# Altium PCB PCB1.PcbDoc
Units mm, origin at the board's own origin, x right, y up, seen from the top; angles counter-clockwise.
Board outline 152.4 x 101.6 mm, 2 copper layers (Top Layer, Bottom Layer); 44 components, 31 nets, 176 pads, 0 vias.
Unrouted connection lines stored in the file: 12.
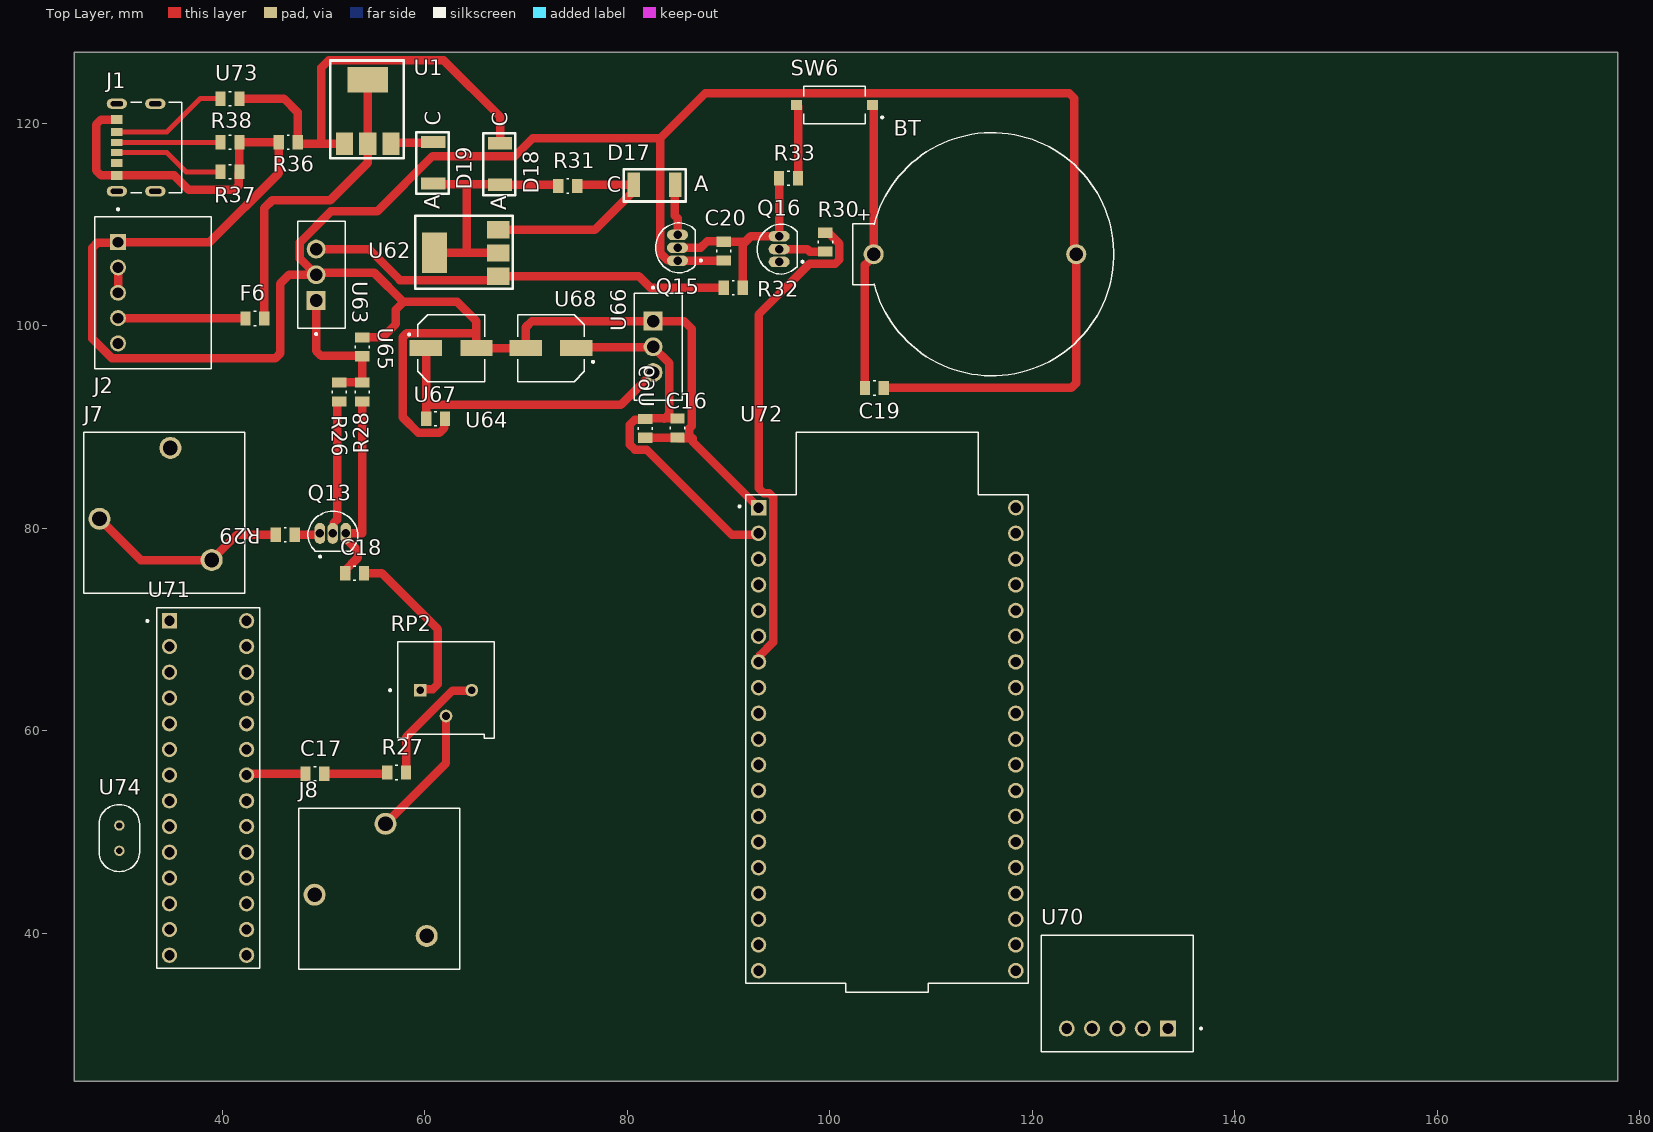
[diagram p0: Top Layer view]
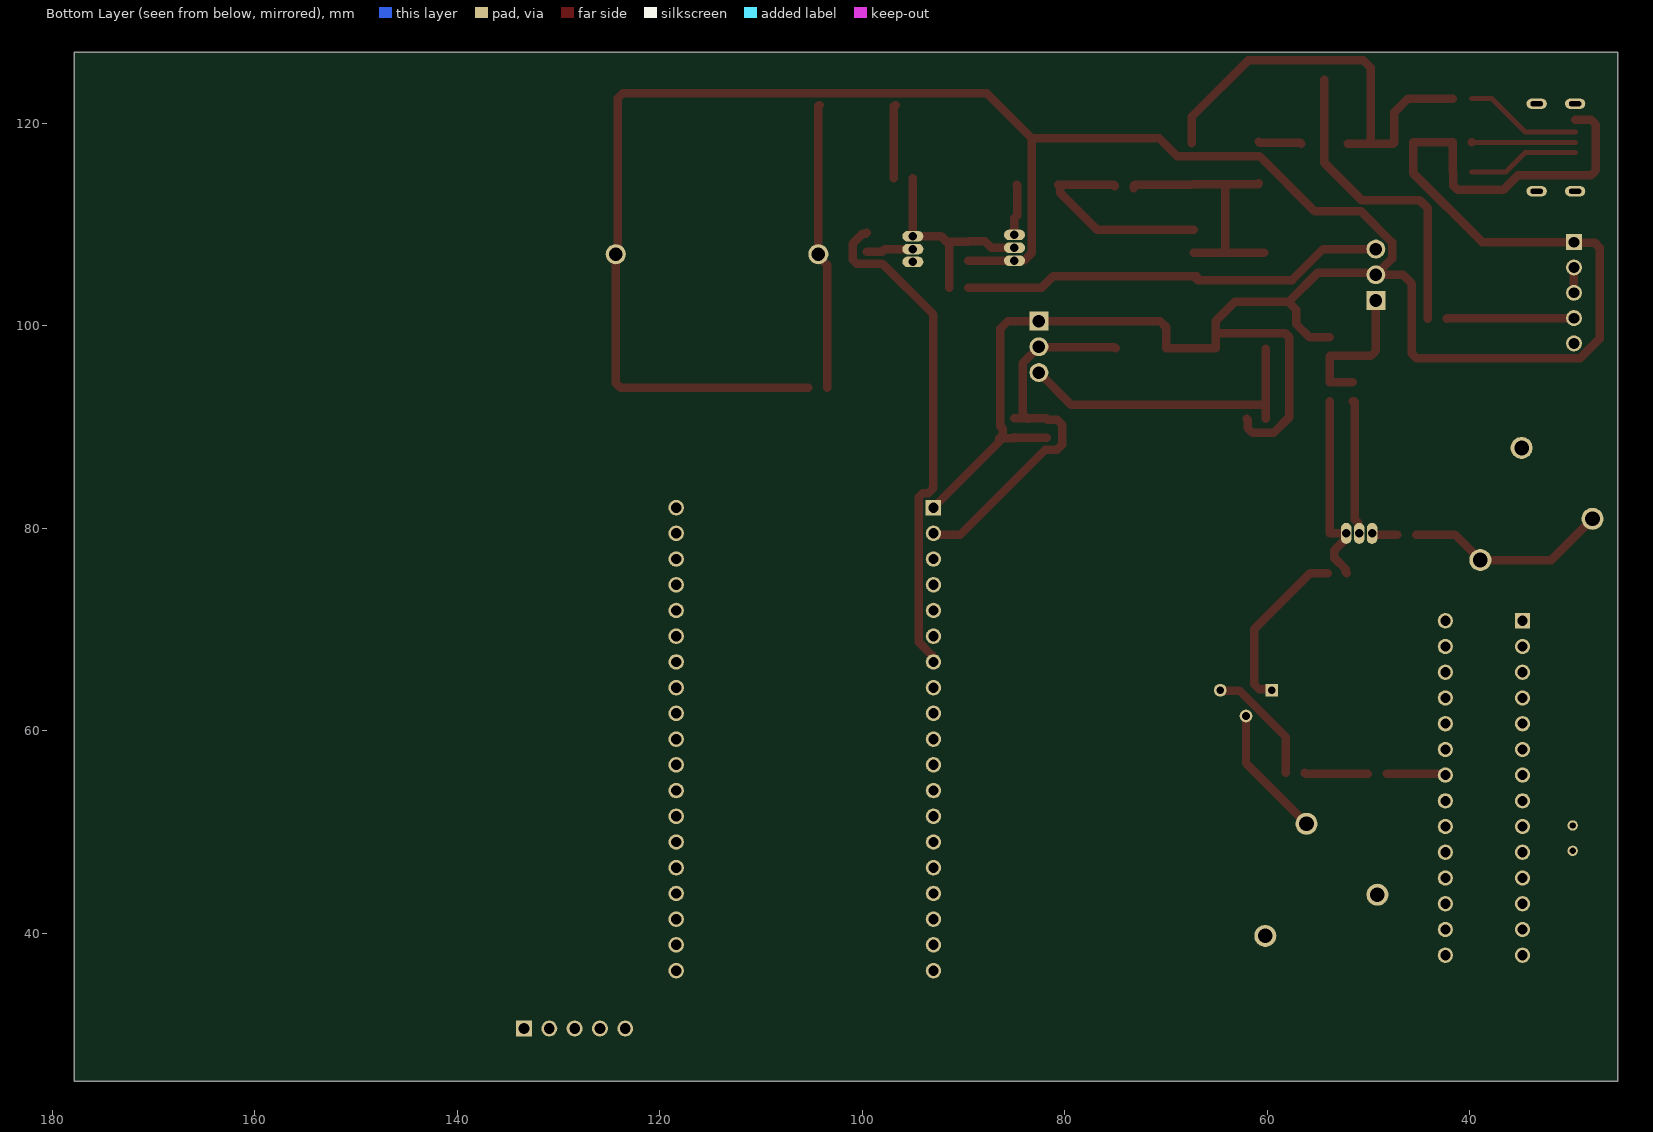
[diagram p1: Bottom Layer view, seen from below]
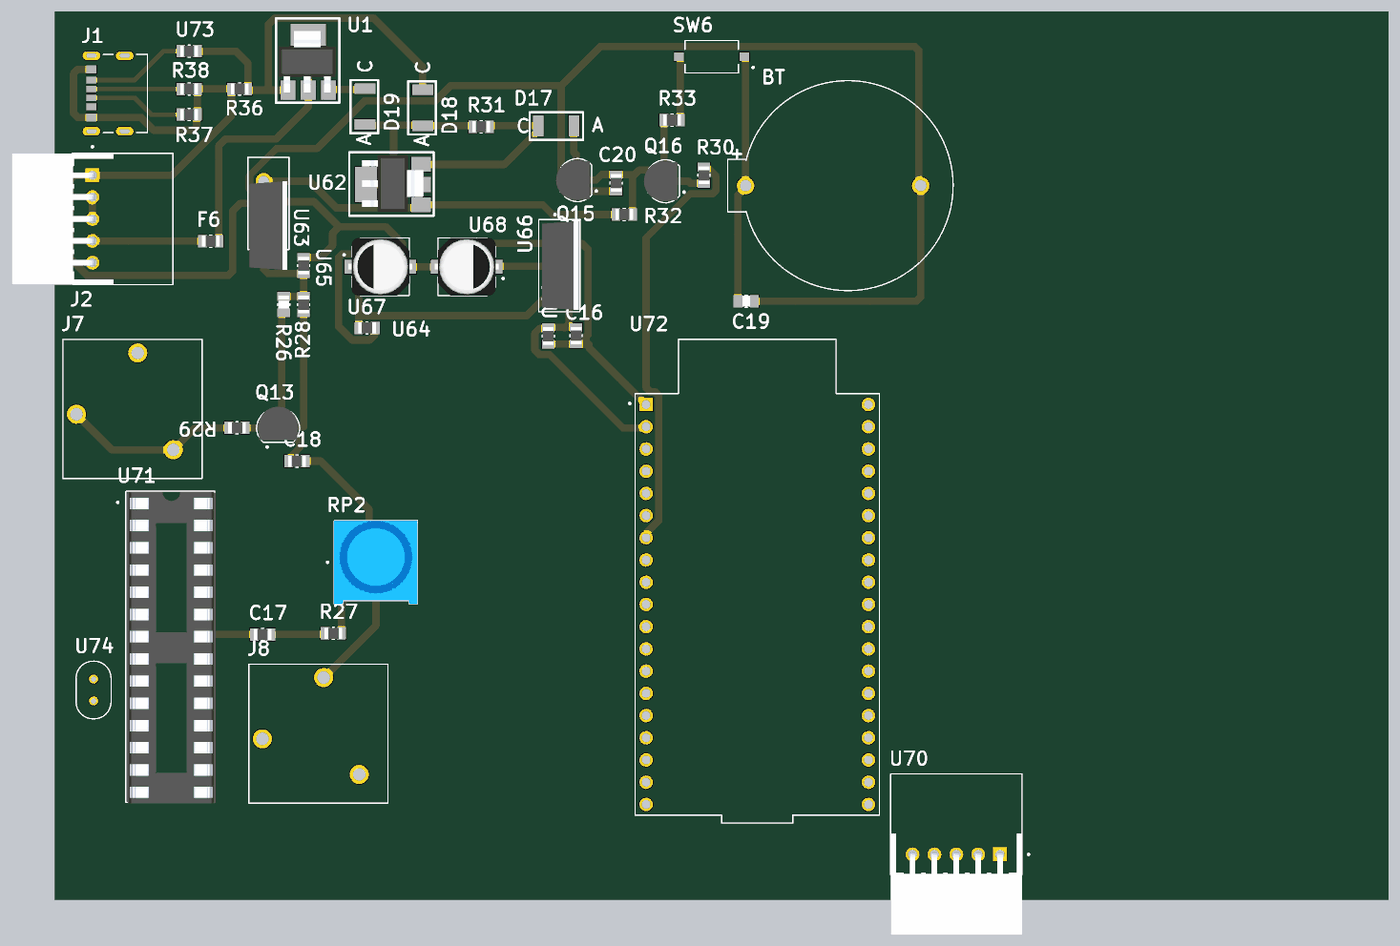
[diagram p2: 3D render of the assembled board from above, using the file's embedded part models]

## Layer stack, top to bottom
Top Solder: solder mask 0.0102, Solder Resist, Dk 3.5
Top Layer: signal copper 0.0356
Dielectric 1: dielectric 0.32, FR-4, Dk 4.8
Bottom Layer: signal copper 0.0356
Bottom Solder: solder mask 0.0102, Solder Resist, Dk 3.5

## Board outline
25.4,25.4 177.8,25.4 177.8,127 25.4,127

## Design rules (kind name [scope] priority, off if disabled: settings)
Clearance [All] p1: gap=0.254 ignorepadtopadclearanceinfootprint=FALSE
PolygonConnect [All] p1: connectstyle=Relief reliefconductorwidth=0.254 reliefentries=4 polygonreliefangle="90 Angle" airgapwidth=0.254
RoutingVias [All] p1: holewidth=0.711 width=1.27 viastyle="Through Hole" minholewidth=0.711 minwidth=1.27 maxholewidth=0.711 maxwidth=1.27
SolderMaskExpansion [All] p1: expansion=0.102 istentingtop=FALSE
Width [All] p1: maxlimit=0.838 minlimit=0.254 preferedwidth=0.838 bottomlayer_maxwidth=0.254 bottomlayer_prefwidth=0.254 minimp=50.000000 maximp=50.000000 favimp=50.000000
30 further rules are at their usual default settings.

## Components (designator, comment, footprint, x,y, rotation, side; value= is the part's Value field where it differs from the comment)
BT "BH32T-C-G" BAT_BH32T-C-G 116.033,107.061 r270 top
C16 "0.1UF" RESC2012X60N 84.963,89.916 r90 top
C17 "100nF" RESC2012X60N 49.149,55.753 r0 top
C18 "100nF" RESC2012X60N 53.086,75.565 r0 top
C19 "0.1UF" RESC2012X60N 104.394,93.853 r180 top
C20 "4.7UF" RESC2012X60N 89.535,107.361 r90 top
D17 "DSCHOTTKY" SS34BF 84.745,113.919 r180 top
D18 "DSCHOTTKY" SS34BF 67.437,113.919 r90 top
D19 "DSCHOTTKY" SS34BF 60.833,114.046 r90 top
F6 "MFU0603FF04000P500" RESC2012X60N 43.226,100.711 r0 top
J1 "UJC-HP-3-SMT-TR" CUI_UJC-HP-3-SMT-TR 29.601,117.6 r90 top
J2 "XH250-05R-010" VALCON_XH250-05R-010 29.718,103.251 r270 top
J7 "320B/PJ-001 3.5Jacks" REAN_RJ3VM 34.29,81.534 r0 top
J8 "320B/PJ-001 3.5Jacks" REAN_RJ3VM 55.528,44.421 r0 top
Q13 "2N3904_C2874602" TO92127P495H495-3 50.927,79.502 r0 top
Q15 "2N3904(SOT-23)" TO92127P495H495-3 84.963,107.696 r90 top
Q16 "2N3904(SOT-23)" TO92127P495H495-3 94.996,107.569 r90 top
R26 "430k" RESC2012X60N 51.562,93.472 r90 top
R27 "43k" RESC2012X60N 57.231,55.88 r180 top
R28 "10k" RESC2012X60N 53.848,93.472 r90 top
R29 "390" RESC2012X60N 46.228,79.375 r0 top
R30 "100k" RESC2012X60N 99.568,108.25 r90 top
R31 "100k" RESC2012X60N 74.122,113.792 r180 top
R32 "100k" RESC2012X60N 90.47,103.759 r0 top
R33 "100k" RESC2012X60N 95.931,114.554 r0 top
R36 "1k" RESC2012X60N 46.528,118.11 r180 top
R37 "5.1k" RESC2012X60N 40.767,115.189 r0 top
R38 "5.1k" RESC2012X60N 40.767,118.11 r0 top
RP2 "R_3386P_EU" TRIM_3386P-1-101TLF 62.103,64.023 r0 top
SW6 "CHS-01TB" SW_TS09-63-25-R-260-SMT-TR 100.457,121.793 r180 top
U1 "IRFL9014" IRFL9014#1 54.37,124.283 r0 top
U62 "IRFL9014" IRFL9014#2 60.96,107.188 r270 top
U63 "7805(SOT-89)" TO254P1054X470X2600-3 49.276,102.489 r90 top
U64 "330nF" RESC2012X60N 61.087,90.805 r180 top
U65 "100nF" RESC2012X60N 53.848,97.917 r270 top
U66 "LM1117T-3.3" TO254P1054X470X1955-3 82.55,97.917 r270 top
U67 "10uF" CAP_EEEHB1H100P 62.611,97.79 r0 top
U68 "10uF" CAP_EEEHB1H100P 72.477,97.79 r180 top
U69 "720-LCGH9RNMXNX1" RESC2012X60N 81.788,89.87 r90 top
U70 "ZJY096S0700BG01蓝色" VALCON_XH250-05R-010 128.397,30.607 r180 top
U71 "DSPIC33FJ128MC802T-I/SO" OST_ED281DT 38.608,54.356 r0 top
U72 "ESP32-S3-WROOM-1U" MODULE_ESP32-DEVKITC 105.664,59.192 r0 top
U73 "2A/100V" RESC2012X60N 40.767,122.428 r0 top
U74 "Crystal Oscillator 10.8x4.5mm" XTAL_ECS-400-20-46X 29.845,49.403 r270 top

## Footprints (in the part's own frame and the unit in brackets; to place one, negate y for a bottom-side part, rotate by r counter-clockwise, add the part's x,y. Pads: shape width x height; smd on the part's side, far side on the other; paste and mask are expansions set on the pad)
BAT_BH32T-C-G [mil]
  round 78 hole 52: NEG(0,326.77) POS(0,-460.63)
  silkscreen extent -473,-541 473,472
CAP_EEEHB1H100P [mm]
  rect 3.2x1.6 smd: 1(-2.5,0) 2(2.5,0)
  silkscreen extent -4.25,-3.3 3.3,3.3, body extent -3.65,-3.3 3.65,3.3, height 5.8
CUI_UJC-HP-3-SMT-TR [mm]
  rect 0.7x1.15 smd: A5(-0.5,0.005) B5(0.5,0.005)
  rect 0.8x1.15 smd: A9(1.52,0.005) B9(-1.52,0.005)
  rect 0.9x1.15 smd: A12(2.75,0.005) B12(-2.75,0.005)
  oval 1x2 hole 0.5 slot 1.2 at 90 deg: S1(-4.32,0) S2(4.32,0) S3(-4.32,-3.8) S4(4.32,-3.8)
  silkscreen extent -4.47,-6.4 4.47,-1.35
IRFL9014#1 [mm]
  rect 1.7x2.2 smd mask+0.102: 1(-2.3,-6.3) 2(0,-6.3) 3(2.3,-6.3)
  rect 4x2.5 smd: 4(0,0)
  silkscreen extent -3.68,-7.75 3.56,1.91, body extent -3.38,-6.55 3.12,0.45, height 1.8
IRFL9014#2 [mm]
  rect 1.7x2.2 smd mask+0.102: 1(-2.3,6.3) 2(0,6.3) 3(2.3,6.3)
  rect 4x2.5 smd: 4(0,0)
  silkscreen extent -3.68,-1.91 3.56,7.75, body extent -3.38,-0.45 3.12,6.55, height 1.8
MODULE_ESP32-DEVKITC [mm]
  rect 1.53x1.53 hole 1.02: 1(-12.7,22.85)
  round 1.53 hole 1.02: 2(-12.7,20.31) 3(-12.7,17.77) 4(-12.7,15.23) 5(-12.7,12.69) 6(-12.7,10.15) 7(-12.7,7.61) 8(-12.7,5.07) 9(-12.7,2.53) 10(-12.7,-0.01) 11(-12.7,-2.55) 12(-12.7,-5.09) 13(-12.7,-7.63) 14(-12.7,-10.17) 15(-12.7,-12.71) 16(-12.7,-15.25) 17(-12.7,-17.79) 18(-12.7,-20.33) 19(-12.7,-22.87) 20(12.7,-22.87) 21(12.7,-20.33) 22(12.7,-17.79) 23(12.7,-15.25) 24(12.7,-12.71) 25(12.7,-10.17) 26(12.7,-7.63) 27(12.7,-5.09) 28(12.7,-2.55) 29(12.7,-0.01) 30(12.7,2.53) 31(12.7,5.07) 32(12.7,7.61) 33(12.7,10.15) 34(12.7,12.69) 35(12.7,15.23) 36(12.7,17.77) 37(12.7,20.31) 38(12.7,22.85)
  silkscreen extent -14.67,-25 13.95,30.3
OST_ED281DT [mm]
  rect 1.508x1.508 / inner round 1.508 / far side rect 1.508x1.508 hole 1: 1(-3.81,16.51)
  round 1.508 hole 1: 2(-3.81,13.97) 3(-3.81,11.43) 4(-3.81,8.89) 5(-3.81,6.35) 6(-3.81,3.81) 7(-3.81,1.27) 8(-3.81,-1.27) 9(-3.81,-3.81) 10(-3.81,-6.35) 11(-3.81,-8.89) 12(-3.81,-11.43) 13(-3.81,-13.97) 14(-3.81,-16.51) 15(3.81,-16.51) 16(3.81,-13.97) 17(3.81,-11.43) 18(3.81,-8.89) 19(3.81,-6.35) 20(3.81,-3.81) 21(3.81,-1.27) 22(3.81,1.27) 23(3.81,3.81) 24(3.81,6.35) 25(3.81,8.89) 26(3.81,11.43) 27(3.81,13.97) 28(3.81,16.51)
  silkscreen extent -6.1,-17.78 5.08,17.78, body extent -4.95,-17.91 5.21,17.65, height 8.7
REAN_RJ3VM [mm]
  round 2.175 hole 1.45: 1(4.67,-4.67) 2(-6.4,-0.6) 3(0.6,6.4)
  silkscreen extent -7.95,-7.95 7.95,7.95
RESC2012X60N [mm]
  rect 1x1.42 smd: 1(-0.935,0) 2(0.935,0)
  silkscreen extent -0.12,-0.7 0.12,0.7, body extent -1,-0.63 1,0.63, height 0.6
SS34BF [mm]
  rect 1.2x2.4 smd: 1(0,0) 2(4.1,0)
  silkscreen extent -1.02,-1.52 5.08,1.65
SW_TS09-63-25-R-260-SMT-TR [mm]
  rect 1.1x1 smd: 1(-3.75,0) 2(3.75,0)
  silkscreen extent -4.82,-1.85 3.05,1.85
TO254P1054X470X1955-3 [mm]
  rect 1.86x1.86 / inner round 1.86 / far side rect 1.86x1.86 hole 1.24: 1(-2.54,0)
  round 1.86 hole 1.24: 2(0,0) 3(2.54,0)
  silkscreen extent -5.94,-1.84 5.27,2.86, body extent -5.08,-1.49 5.08,2.71, height 22.86
TO254P1054X470X2600-3 [mm]
  rect 1.86x1.86 / inner round 1.86 / far side rect 1.86x1.86 hole 1.24: 1(0,0)
  round 1.86 hole 1.24: 2(2.54,0) 3(5.08,0)
  silkscreen extent -3.41,-2.9 7.81,1.8, body extent -5.08,-2.72 5.08,1.64, height 20.4
TO92127P495H495-3 [mm]
  oval 1.04x2.08 hole 0.84: 1(-1.27,0) 2(0,0) 3(1.27,0)
  silkscreen extent -2.48,-2.4 2.48,2.16, body extent -2.28,-1.55 2.28,2.28, height 20.44
TRIM_3386P-1-101TLF [mm]
  rect 1.268x1.268 hole 0.76: 1(-2.54,-0.015)
  round 1.268 hole 0.76: 2(0,-2.555) 3(2.54,-0.015)
  silkscreen extent -5.61,-4.76 4.76,4.76, body extent -4.76,-4.76 4.76,4.77, height 10.92
VALCON_XH250-05R-010 [mm]
  rect 1.575x1.575 / inner round 1.575 / far side rect 1.575x1.575 hole 1.05 mask+0.05: 01(-5,0)
  round 1.575 hole 1.05 mask+0.05: 02(-2.5,0) 03(0,0) 04(2.5,0) 05(5,0)
  silkscreen extent -8.35,-2.3 7.5,9.2, body extent -7.5,-9.2 7.5,2.4, height 5.68
XTAL_ECS-400-20-46X [mm]
  round 1.03 hole 0.63: 1(-1.25,0) 2(1.25,0)
  silkscreen extent -3.3,-2 3.3,2

## Part data
BT: "BATTERY HOLDER COIN 20MM PC PIN", Package=None, Availability=Unavailable, MF=MPD, MP=BH32T-C-G, Price=None, SnapEDA_Link=https://www.snapeda.com/parts/BH32T-C-G/Memory%20Protection%20Devices/view-part/4219673/?ref=snap
C16 C19 C20: JLCPCB Part Class="Extended Part", Manufacturer=ReliaPro, Manufacturer Part="250V 0.1UF 5% CBBCapacitor", nameAlias=Value, spicePre=C, spiceSymbolName="250V 0.1UF 5% CBBCapacitor", Supplier=LCSC, Supplier Part=C46804
D17 D18 D19: JLCPCB Part Class="Extended Part", Manufacturer=null, Manufacturer Part=DSchottky, Contributor=LCSC, spicePre=D, spiceSymbolName=DSCHOTTKY, Supplier=LCSC, Supplier Part=C9900012836
F6: JLCPCB Part Class="Extended Part", Manufacturer=VISHAY(威世), Contributor=LCSC, Manufacturer Part=MFU0603FF04000P500, spicePre=F, spiceSymbolName=MFU0603FF04000P500, Supplier=LCSC, Supplier Part=C1972776
J1: "Type C, 3 A, Right Angle, Surface Mount (SMT), Power-Only USB Receptacle", Package=None, Availability=Unavailable, MP=UJC-HP-3-SMT-TR, Price=None
J2: "Valcon Wire-to-Board 2.50mm Straight & Right Angle PCB Connectors", Package=None, Check_prices=https://www.snapeda.com/parts/XH250-05R-010/Valcon/view-part/?ref=eda, MF=Valcon, MP=XH250-05R-010, SnapEDA_Link=https://www.snapeda.com/parts/XH250-05R-010/Valcon/view-part/?ref=snap
J7 J8: Manufacturer=ReliaPro, Manufacturer Part="320B/PJ-001 3.5Jacks", spicePre=J, spiceSymbolName="320B/PJ-001 3.5Jacks", Supplier=LCSC, Supplier Part=C3792
Q13: JLCPCB Part Class="Extended Part", Manufacturer=JSMSEMI(杰盛微), Manufacturer Part=2N3904, Contributor=LCSC, spicePre=Q, spiceSymbolName=2N3904_C2874602, Supplier=LCSC, Supplier Part=C2874602
Q15 Q16: Manufacturer=KEC, Manufacturer Part=2n3904S-RTK/PS, Contributor=LCEDA_Lib, Paste Type=SOT-23, spicePre=Q, spiceSymbolName=2N3904(SOT-23), Supplier=LCSC, Supplier Part=C18536
R37 R38: library part 1k, Contributor=LCEDA_Lib, nameAlias=Value(Ω), spicePre=R, spiceSymbolName=R_0603_US
RP2: Package Display=No, Value(Ω)=100K, Contributor=LCEDA_Lib, nameAlias="Resistance (Ohms)", spicePre=R, spiceSymbolName=R_3386P_EU, Supplier=LCSC
SW6: JLCPCB Part Class="Extended Part", Manufacturer=NIDEC(尼得科), Contributor=LCSC, Manufacturer Part=CHS-01TB, spicePre=S, spiceSymbolName=CHS-01TB, Supplier=LCSC, Supplier Part=C2680613
U1 U62: Manufacturer="TECH PUBLIC(台舟)", Contributor=lcsc, Manufacturer Part=IRFL9014, spicePre=U, spiceSymbolName=IRFL9014, Supplier=LCSC, Supplier Part=C5246418
U63: Manufacturer=CJ, Manufacturer Part=CJ78L05, Contributor=LCEDA_Lib, image=//image.lceda.cn/szlcsc/C2079.jpg, Paste Type=expand, spicePre=U, spiceSymbolName=7805(SOT-89), Supplier=LCSC, Supplier Part=C2079
U64 U65: Manufacturer=TDK, Manufacturer Part=B32560J3334K000, Contributor=lcsc, nameAlias=Value, spicePre=U, spiceSymbolName=B32560J3334K000, Supplier=LCSC, Supplier Part=C3768307
U66: JLCPCB Part Class="Extended Part", Manufacturer=HGSEMI(华冠), Contributor=LCSC, Manufacturer Part=LM1117T-3.3, spicePre=U, spiceSymbolName=LM1117T-3.3, Supplier=LCSC, Supplier Part=C498321
U67 U68: Manufacturer="Kyocera AVX", Manufacturer Part=F980J106MMA, Contributor=lcsc, nameAlias=Value, spicePre=U, spiceSymbolName=F980J106MMA, Supplier=LCSC, Supplier Part=C4153836
U69 U72: JLCPCB Part Class="Extended Part", Manufacturer=null, Contributor=lcsc, spicePre=U, Supplier=LCSC
  U69: Manufacturer Part=720-LCGH9RNMXNX1, spiceSymbolName=720-LCGH9RNMXNX1, Supplier Part=C9900019959
  U72: Manufacturer Part=ESP32-S3-WROOM-1U, spiceSymbolName=ESP32-S3-WROOM-1U, Supplier Part=C9900027631
U70: Manufacturer=郑州中景园电子技术有限公司, Contributor=lcsc, Manufacturer Part=ZJY096S0700BG01蓝色, spicePre=U, spiceSymbolName=ZJY096S0700BG01蓝色, Supplier=LCSC, Supplier Part=C9900027058
U71: JLCPCB Part Class="Extended Part", Manufacturer=MICROCHIP(美国微芯), Manufacturer Part=dsPIC33FJ128MC802T-I/SO, Contributor=lcsc, spicePre=U, spiceSymbolName=DSPIC33FJ128MC802T-I/SO, Supplier=LCSC, Supplier Part=C629364
U73: JLCPCB Part Class="Extended Part", Manufacturer=null, Manufacturer Part=20A/100V, Contributor=lcsc, spicePre=U, spiceSymbolName=20A/100V, Supplier=LCSC, Supplier Part=C9900024395
C17 C18: Contributor=LCEDA_Lib, nameAlias=Value(F), spicePre=C, spiceSymbolName=C_0603_US
R26 R27 R28 R29 R30 R31 R32 R33 R36: Contributor=LCEDA_Lib, nameAlias=Value(Ω), spicePre=R, spiceSymbolName=R_0603_US
U74: Contributor=colebenedicto, spicePre=U, spiceSymbolName="Crystal Oscillator 10.8x4.5mm"

## Nets (pads, with @x,y where several pads share a name; then routed paths per layer and width w, separated by ;. In a path a pad name is that pad's centre, name@x,y a point inside that pad or via, vN(x,y) a via of type N, cw(c..) or ccw(c..) an arc to the next point about the centre after c; other vN are vias at no path point)
3.3v: C16.2 U66.2 U68.1 U69.2 U71.13 U72.2 | length 39
  Top Layer w0.838: U68.1 75.041,97.853 82.486,97.853 U66.2 84.153,96.314 84.153,91.296 83.662,90.805 ; C16.2 83.662,90.851 81.834,90.851 81.707,90.724 80.755,90.724 80.264,90.233 80.264,88.253 80.755,87.762 81.91,87.762 90.297,79.375 92.837,79.375 U72.2
5v: R26.2 R28.2 U63.1 U65.2 | length 14.6
  Top Layer w0.838: U63.1 49.276,97.517 49.767,97.026 53.804,97.026 U65.2 R28.2 R26.2
GND: BT.NEG C16.1 C19.1 C20.1 J1.A12 J1.B12 J2.01 J7.1 J7.2 J8.1 J8.2 Q15.1 Q16.1 R27.1 R29.1 R36.2 R37.2 R38.2 RP2.3 U63.2 U64.1 U65.1 U66.1 U67.2 U68.2 U69.1 U71.19 U72.1 | length 374.2
  Top Layer w0.838: J7.2 31.96,76.864 J7.1 41.471,79.375 R29.1 ; J1.A12 28.05,120.35 27.559,119.859 27.559,115.341 28.05,114.85 J1.B12 35.264,114.85 36.703,113.411 41.211,113.411 41.621,113.821 41.621,115.108 R37.2 R38.2 R36.2 45.593,115.062 38.782,108.251 J2.01 29.409,108.251 29.35,108.191 27.673,108.191 27.182,107.7 27.182,98.721 29.113,96.79 45.25,96.79 45.741,97.281 45.741,104.161 46.609,105.029 U63.2 47.673,106.632 47.673,108.233 50.743,111.303 55.338,111.303 60.781,116.746 68.916,116.746 70.661,118.491 83.25,118.491 ; U63.2@49.472,105.225 55.022,105.225 57.898,102.348 ; U65.1 55.815,98.852 57.15,100.187 57.15,101.454 ; 57.15,101.6 57.898,102.348 ; R27.1 58.166,59.38 62.752,63.965 64.6,63.965 RP2.3 ; U64.1 61.941,90.724 61.941,89.913 61.45,89.422 59.373,89.422 57.838,90.957 57.838,98.869 58.232,99.263 65.111,99.263 ; U69.1 81.811,88.958 84.94,88.958 C16.1 85.044,88.9 86.106,88.9 86.106,89.832 86.346,90.072 86.346,99.726 85.615,100.457 U66.1 70.587,100.457 69.977,99.847 U68.2 U67.2 65.111,99.263 ; 86.45,88.9 86.45,88.556 U72.1 ; C20.1 Q15.1 84.924,106.465 83.987,106.465 83.25,107.202 83.25,118.491 ; C19.1 123.842,93.853 124.333,94.344 BT.NEG 124.114,107.28 124.114,122.475 123.623,122.966 87.725,122.966 83.25,118.491 ; 57.898,102.348 63.211,102.348 65.111,100.448 65.111,99.263
NetBT_POS: BT.POS C19.2 SW6.1 | length 28.7
  Top Layer w0.838: C19.2 103.459,105.998 104.333,106.872 BT.POS ; SW6.1 104.252,121.793 104.333,121.712 BT.POS@104.333,106.752
NetC17_1: C17.1 U71.22 | length 5.8
  Top Layer w0.838: U71.22 42.545,55.753 C17.1
NetC17_2: C17.2 Q13.2 R26.1 R27.2 | length 19.7
  Top Layer w0.838: C17.2 56.215,55.753 56.296,55.834 R27.2 ; Q13.2 50.966,79.541 50.966,80.203 51.004,80.242 51.004,80.516 51.352,80.864 51.352,92.456 51.433,92.537 R26.1
NetC18_1: C18.1 Q13.3 R28.1 | length 19.6
  Top Layer w0.838: C18.1 52.232,75.646 52.232,75.938 53.242,76.948 53.389,77.095 53.389,77.79 52.263,78.916 52.263,79.436 Q13.3 53.848,79.502 R28.1
NetC18_2: C18.2 RP2.1 | length 17
  Top Layer w0.838: C18.2 55.778,75.565 61.31,70.033 61.31,64.611 60.819,64.12 59.675,64.12 RP2.1
NetC20_2: C20.2 Q15.2 Q16.3 R32.2 R33.1 | length 20.9
  Top Layer w0.838: Q15.2 87.249,107.696 87.884,108.331 89.5,108.331 C20.2 91.659,108.296 ; R32.2 91.405,108.042 91.659,108.296 ; R33.1 Q16.3 92.202,108.839 91.659,108.296
NetD17_1: D17.1 Q15.3 | length 5.1
  Top Layer w0.838: D17.1 84.709,113.883 84.709,110.871 84.963,110.617 Q15.3
NetD17_2: D17.2 R31.1 U62.1 | length 21.2
  Top Layer w0.838: U62.1@67.26,109.474 76.8,109.474 80.464,113.138 80.464,113.738 D17.2 75.138,113.919 75.057,113.838 R31.1
NetD18_2: D18.2 R36.1 U1.1 U73.2 | length 44.3
  Top Layer w0.838: U73.2 46.101,122.428 47.463,121.066 R36.1 47.463,118.064 47.544,117.983 49.807,117.983 ; U1.1 49.807,117.983 ; D18.2 67.437,120.65 61.881,126.206 50.514,126.206 49.807,125.499 49.807,117.983
NetD19_2: D19.2 U1.3 | length 4.2
  Top Layer w0.838: U1.3 56.751,118.064 60.751,118.064 D19.2
NetF6_1: F6.1 J2.04 | length 12.6
  Top Layer w0.838: J2.04 29.738,100.731 42.271,100.731 F6.1
NetF6_2: F6.2 U1.2 U1.4 | length 31.2
  Top Layer w0.838: F6.2 44.161,111.615 44.941,112.395 50.673,112.395 54.37,116.092 U1.4
NetJ1_A5: J1.A5 R37.1 | length 11
  Top Layer w0.508: J1.A5 34.538,117.1 36.449,115.189 R37.1
NetJ1_A9: J1.A9 U73.1 | length 11.6
  Top Layer w0.508: J1.A9 34.538,119.12 37.846,122.428 U73.1
NetJ1_B5: J1.B5 R38.1 | length 10.2
  Top Layer w0.508: J1.B5 R38.1@39.822,118.1
  Top Layer w0.838: R38.1@39.822,118.1 R38.1
NetJ2_02: J2.02 J2.03 | length 2.5
  Top Layer w0.838: J2.03 J2.02
NetJ7_3: J7.3 U71.6
NetJ8_3: J8.3 RP2.2 | length 13.1
  Top Layer w0.838: J8.3 62.103,56.796 RP2.2
NetQ13_1: Q13.1 R29.2 | length 2.6
  Top Layer w0.838: R29.2 49.564,79.375 49.657,79.468 Q13.1
NetQ16_2: Q16.2 R30.1 | length 4.7
  Top Layer w0.838: Q16.2 97.79,107.569 98.044,107.315 R30.1
NetR30_2: R30.2 U72.7 | length 49.4
  Top Layer w0.838: U72.7 93.096,66.934 93.096,67.441 94.402,68.746 94.402,83.086 94.008,83.48 93.455,83.48 92.964,83.971 92.964,101.092 98.014,106.142 100.557,106.142 100.951,106.536 100.951,108.094 99.941,109.104 99.649,109.104 R30.2
NetR32_1: R32.1 U62.3 U63.3 U64.2 U66.3 U67.1 | length 73
  Top Layer w0.838: U63.3 54.494,107.569 57.548,104.515 66.887,104.515 U62.3 ; U64.2 60.152,92.202 U67.1@60.152,97.749 ; 60.198,92.202 79.375,92.202 U66.3 ; U62.3@66.983,104.888 U62.3 ; R32.1 82.278,103.759 81.149,104.888 U62.3
NetR33_2: R33.2 SW6.2 | length 7.3
  Top Layer w0.838: SW6.2 96.757,121.793 96.866,121.684 R33.2
NetU70_3: U72.31
NetU70_4: U72.30
NetU71_9: U71.9 U74.1
NetU71_10: U71.10 U74.2
VCC: D18.1 D19.1 R31.2 U62.2 U62.4 | length 26.4
  Top Layer w0.838: U62.4@60.316,107.188 U62.4 64.135,107.188 ; D19.1 60.896,113.983 64.135,113.983 ; U62.2 64.135,107.188 ; R31.2@73.187,113.582 R31.2 73.187,113.838 73.106,113.919 D18.1 67.373,113.983 64.135,113.983 ; 64.135,107.188 64.135,113.983
pads on no net: J1.B9 J1.S1 J1.S2 J1.S3 J1.S4 J2.05 U70.01 U70.02 U70.03 U70.04 U70.05 U71.1 U71.2 U71.3 U71.4 U71.5 U71.7 U71.8 U71.11 U71.12 U71.14 U71.15 U71.16 U71.17 U71.18 U71.20 U71.21 U71.23 U71.24 U71.25 U71.26 U71.27 U71.28 U72.3 U72.4 U72.5 U72.6 U72.8 U72.9 U72.10 U72.11 U72.12 U72.13 U72.14 U72.15 U72.16 U72.17 U72.18 U72.19 U72.20 U72.21 U72.22 U72.23 U72.24 U72.25 U72.26 U72.27 U72.28 U72.29 U72.32 U72.33 U72.34 U72.35 U72.36 U72.37 U72.38

## Text inside footprints (layer, text, board x,y; h text height)
BT: Top Overlay "+" at 102.833,111.641 h1.27 r270
D17: Top Overlay "C" at 77.978,113.157 h1.52; Top Overlay "A" at 86.614,113.284 h1.52
D18: Top Overlay "C" at 68.199,119.634 h1.52 r90; Top Overlay "A" at 68.072,111.379 h1.52 r90
D19: Top Overlay "C" at 61.595,119.761 h1.52 r90; Top Overlay "A" at 61.468,111.506 h1.52 r90